# Altium PCB LHC.PcbDoc
Units mil, origin at the board's own origin, x right, y up, seen from the top; angles counter-clockwise.
Board outline 2559.05 x 2204.72 mil, 4 copper layers (Top Layer, Internal Plane 1, Internal Plane 2, Bottom Layer), stack 30.634 mil thick; 82 components, 84 nets, 364 pads, 68 vias.
Unrouted connection lines stored in the file: 1.
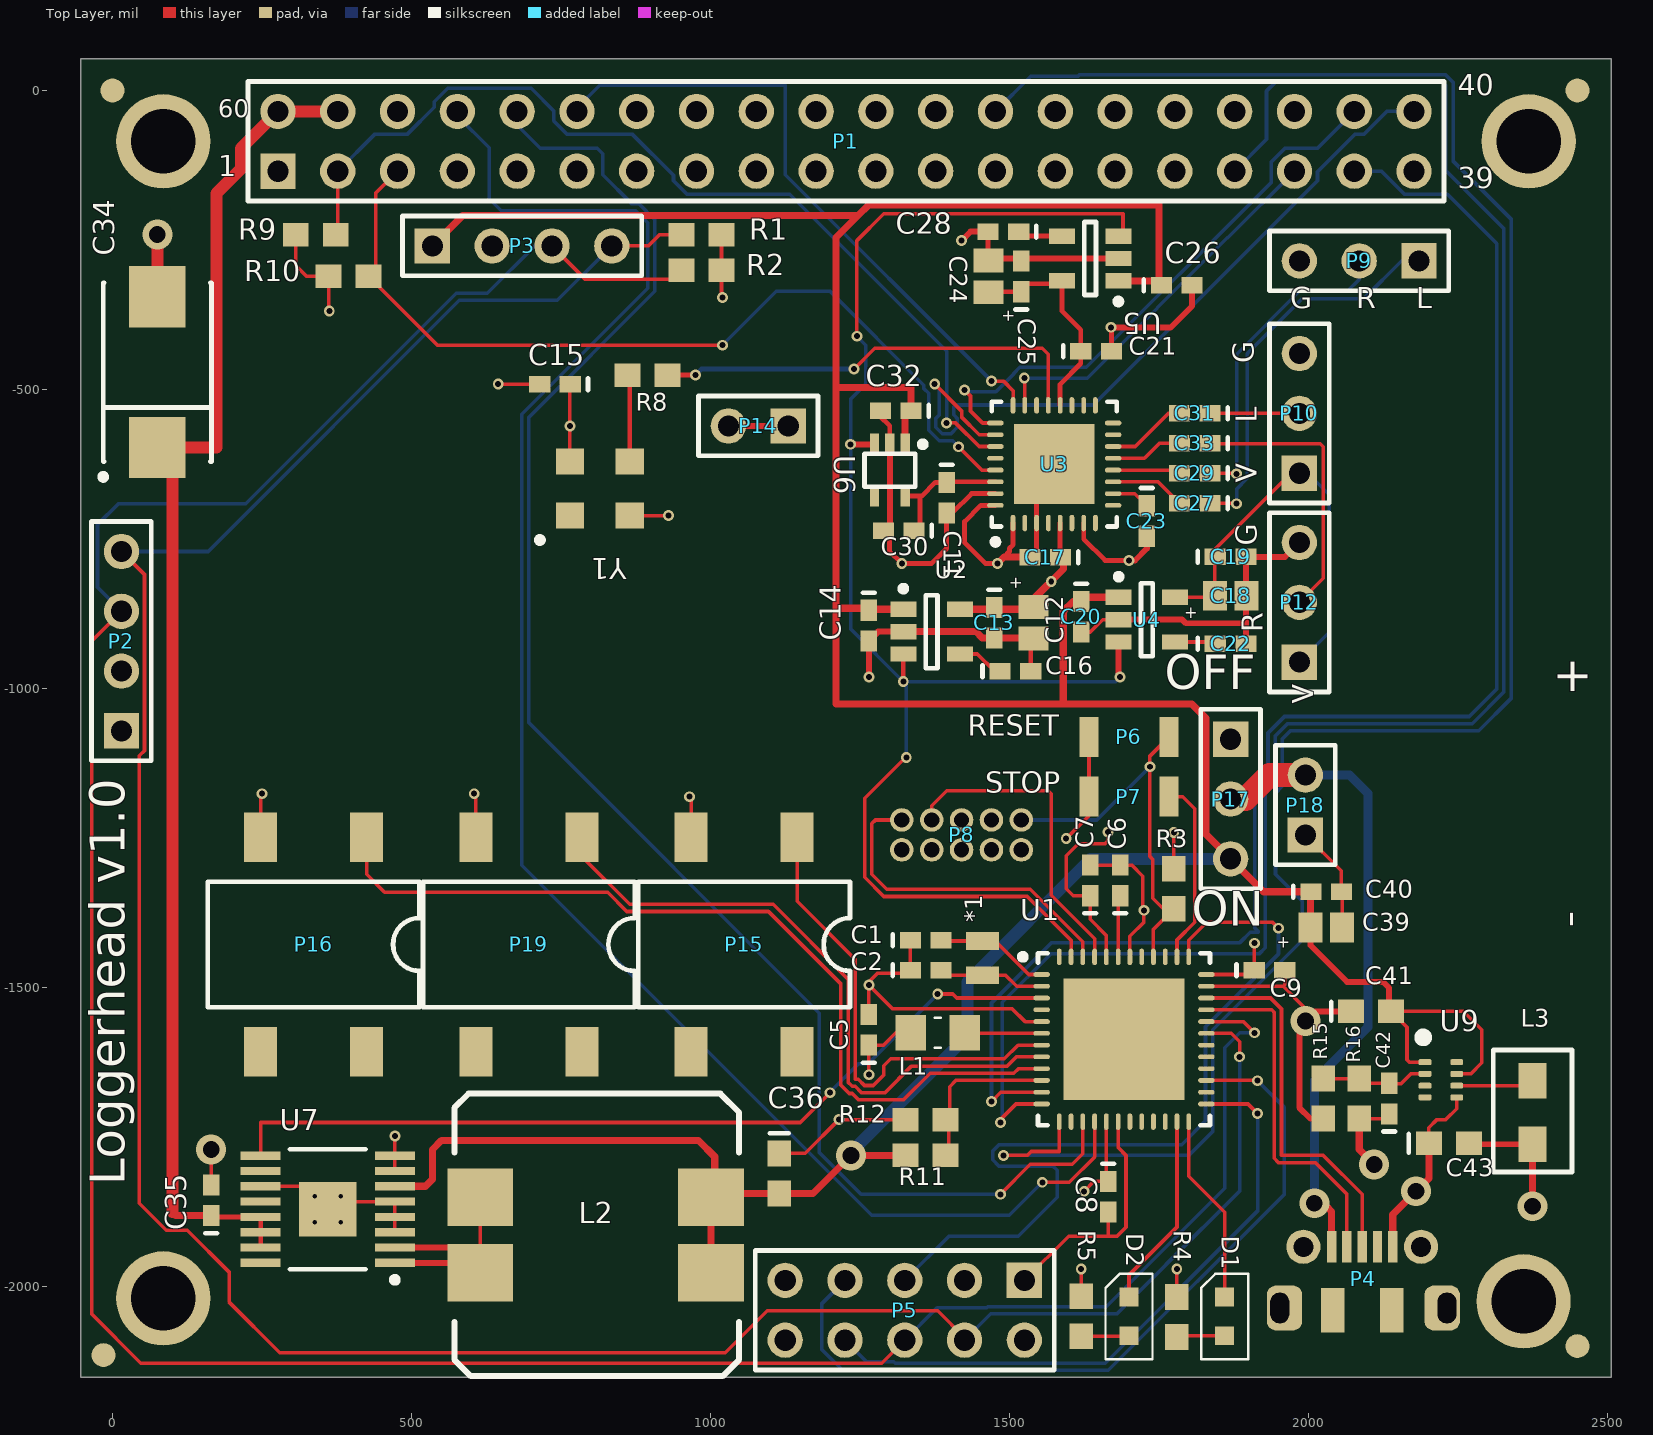
[diagram p0: Top Layer view]
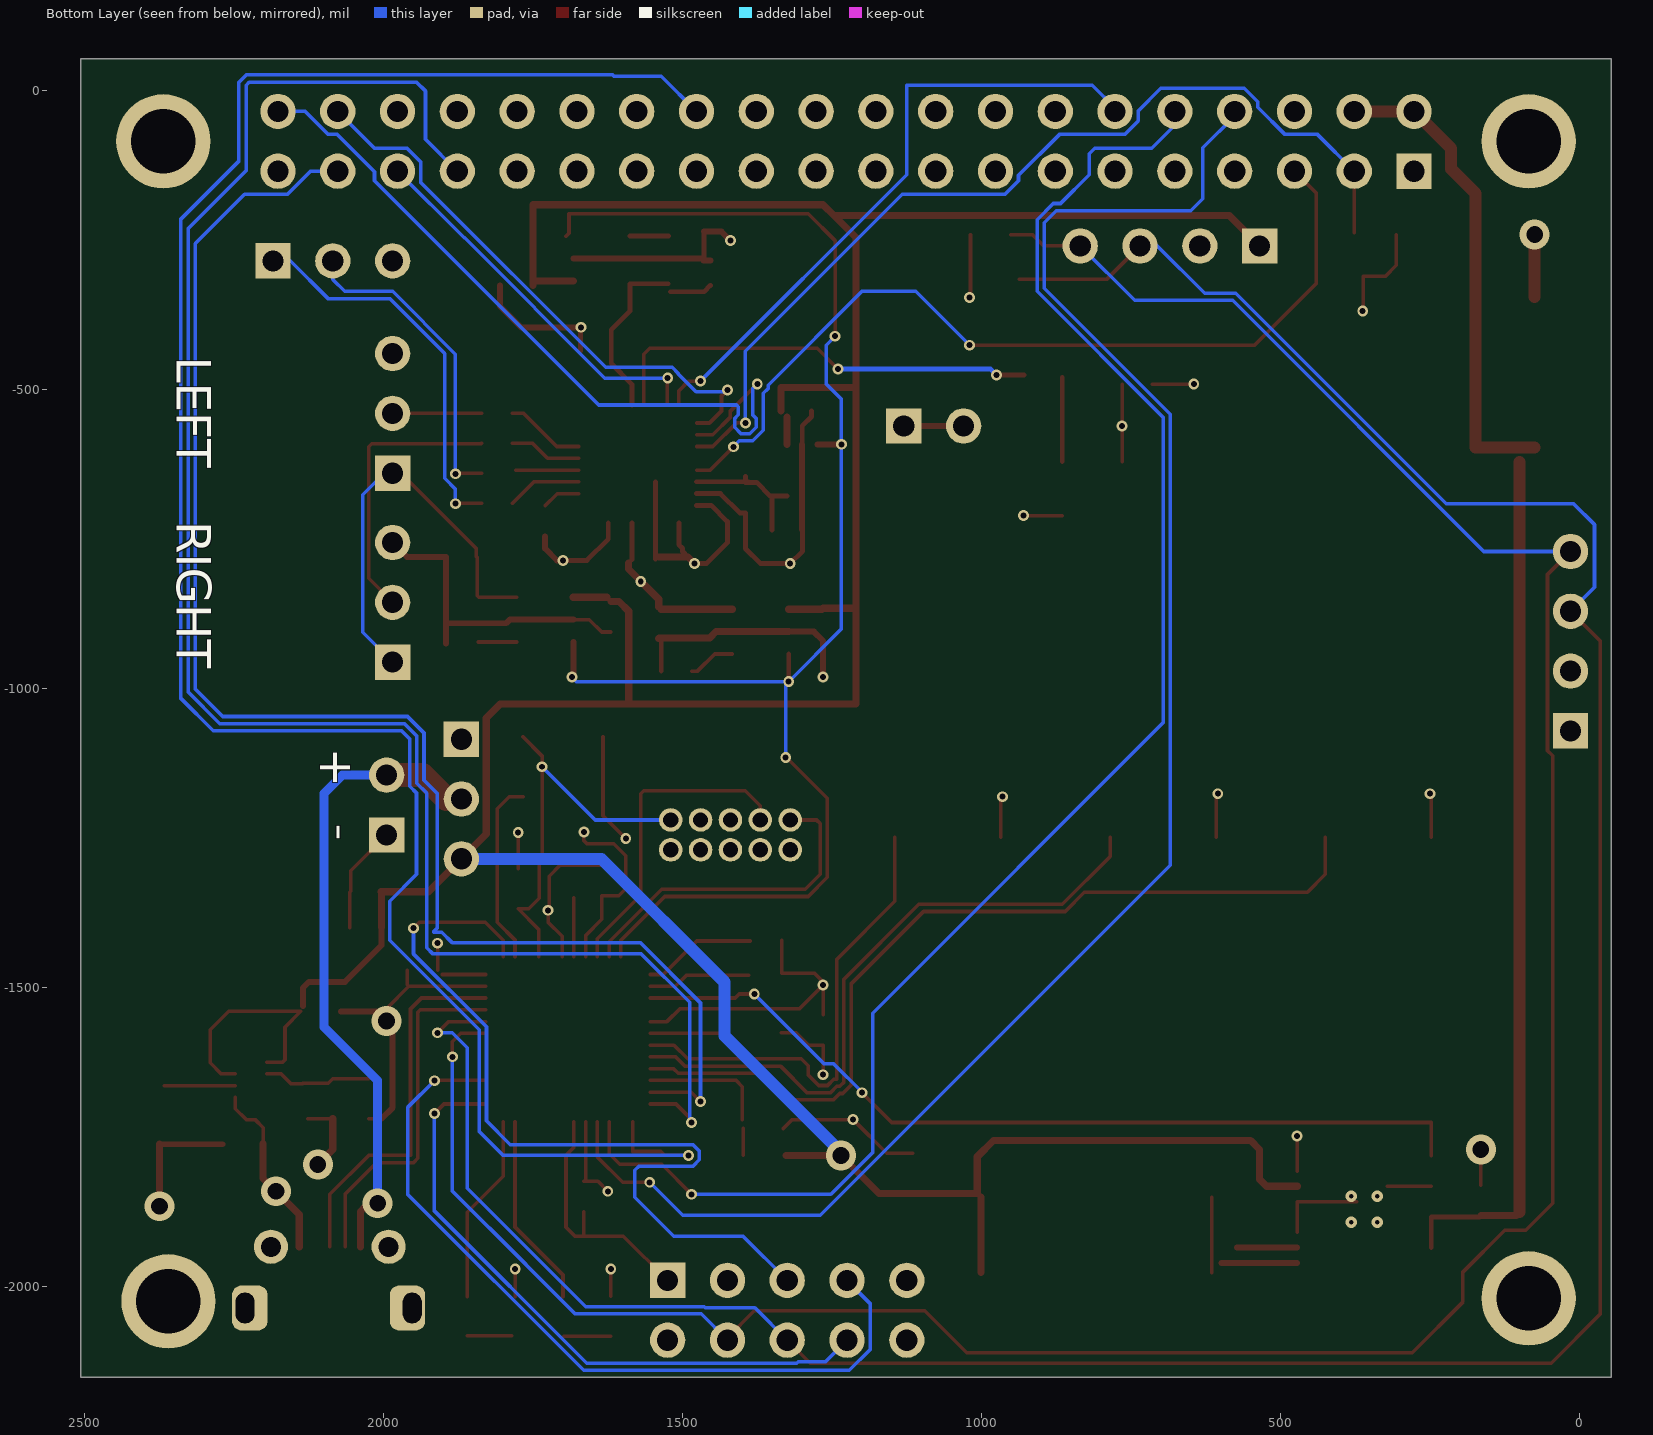
[diagram p1: Bottom Layer view, seen from below]
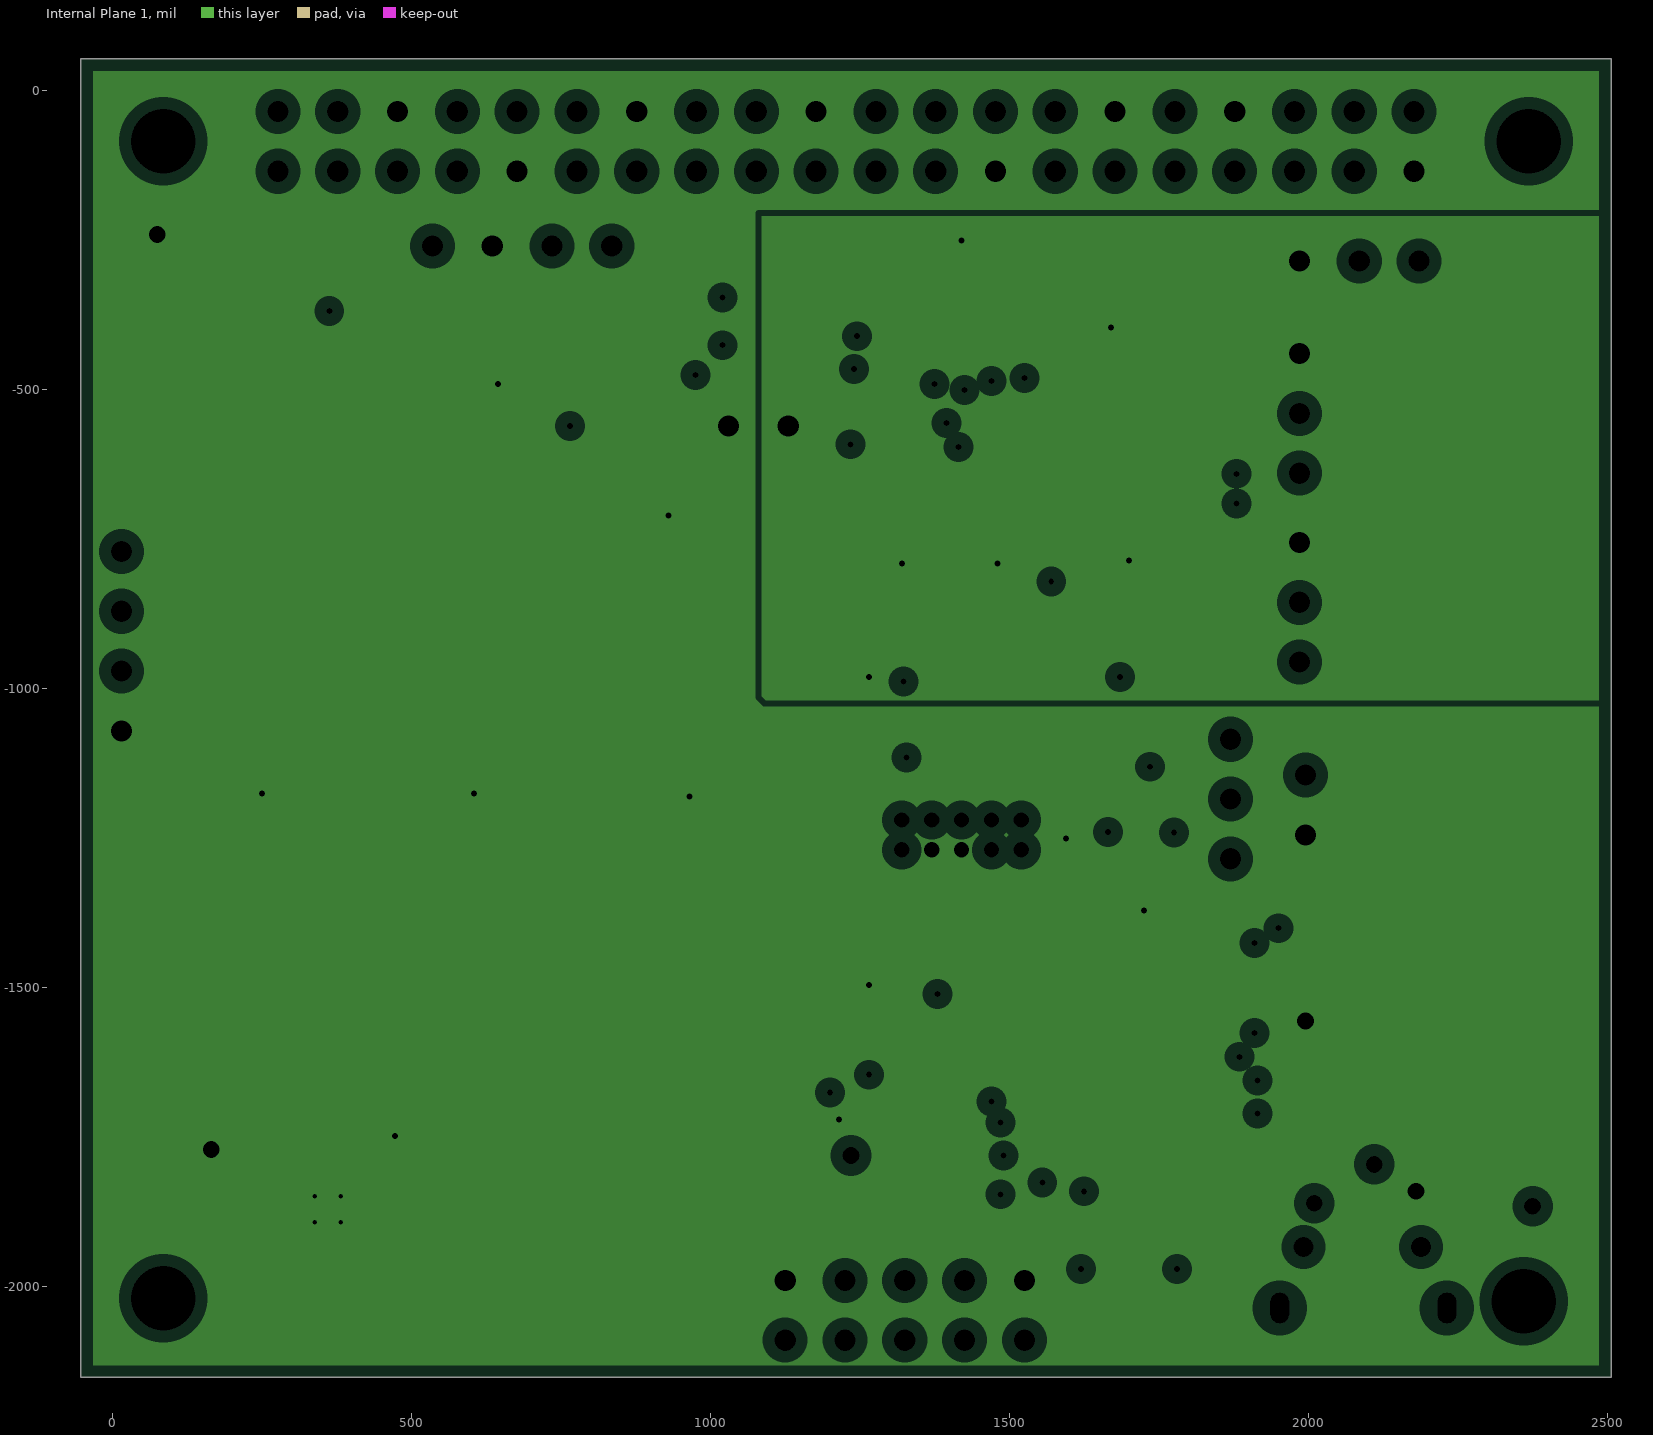
[diagram p2: Internal Plane 1, clearances drawn from the general rule]
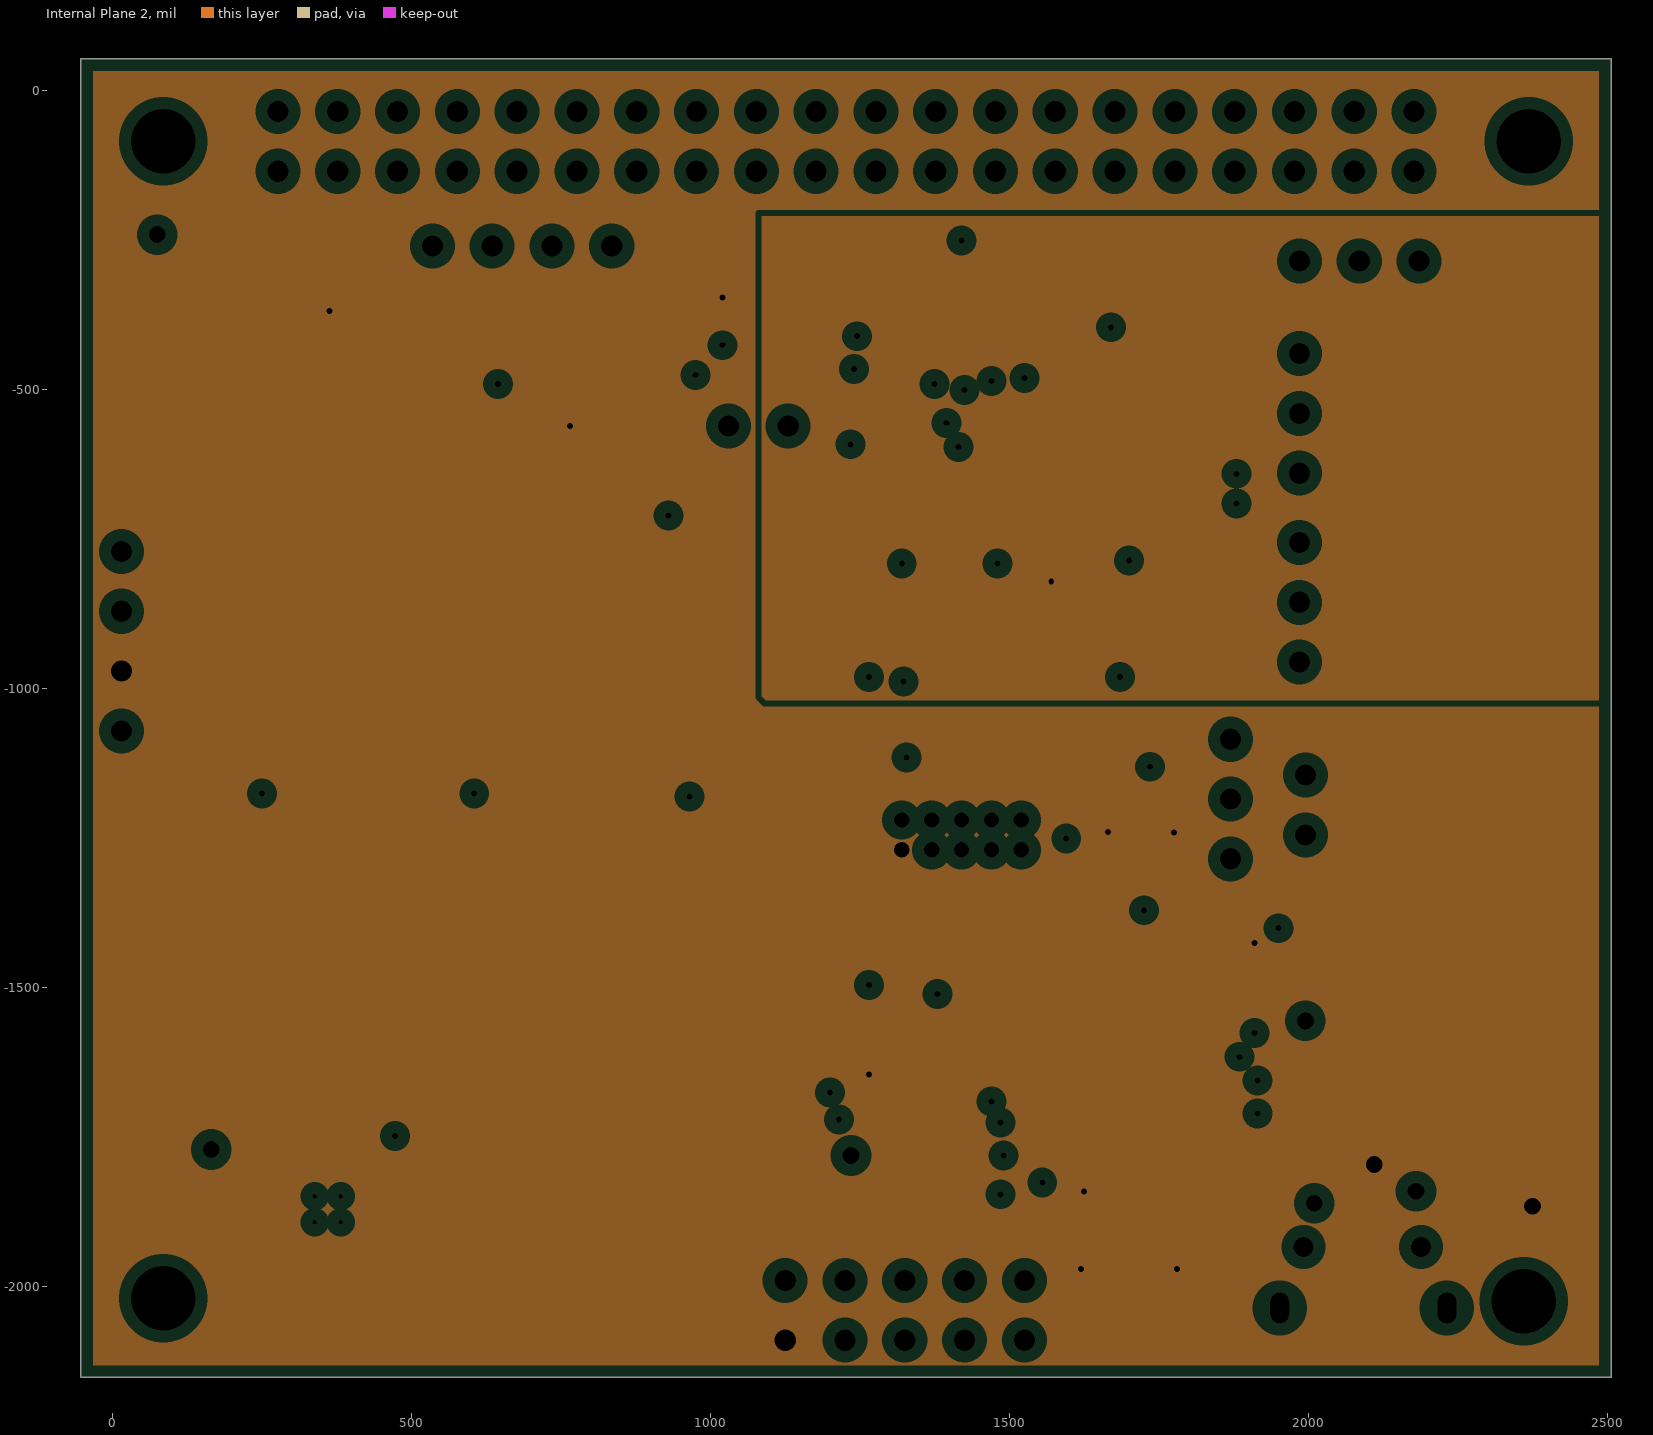
[diagram p3: Internal Plane 2, clearances drawn from the general rule]

## Layer stack, top to bottom
Top Solder: solder mask 0.4, Solder Resist, Dk 3.5
Top Layer: signal copper 1.4
Dielectric 1: core 10, FR-4, Dk 4.2
Internal Plane 1: plane copper 1.417, net (Multiple Nets)
Dielectric 3: prepreg 5, Dk 4.2
Internal Plane 2: plane copper 1.417, net (Multiple Nets)
Dielectric 2: core 10, Dk 4.2
Bottom Layer: signal copper 1.4
Bottom Solder: solder mask 0.4, Solder Resist, Dk 3.5

## Board outline
-52.8,-2151.93 -52.8,52.8 2506.26,52.8 2506.26,-2151.93

## Design rules (kind name [scope] priority, off if disabled: settings)
Clearance [All] p1: gap=6
PlaneClearance [All] p1: clearance=20
PlaneConnect [All] p1: planeconnectstyle=Relief reliefexpansion=20 reliefentries=4 reliefconductorwidth=10 reliefairgap=10
PolygonConnect [All] p1: connectstyle=Relief reliefconductorwidth=10 reliefentries=4 polygonreliefangle="90 Angle" airgapwidth=10
RoutingVias [All] p1: holewidth=10 width=50 viastyle="Through Hole" minholewidth=10 minwidth=18 maxholewidth=50 maxwidth=50
SolderMaskExpansion [All] p1: expansion=4
Width [All] p1: maxlimit=50 minlimit=6 preferedwidth=8
27 further rules are at their usual default settings.

## Classes and differential pairs
component class LHC: *1 C1 C2 C5 C6 C7 C8 C9 D1 D2 L1 P1 P2 P3 P4 P5 P6 P7 P8 P15 P16 P19 R1 R2 R3 R4 R5 U1
component class LHC_Power: 50 C34 C35 C36 C39 C40 C41 C42 C43 L2 L3 P17 P18 R11 R12 R15 R16 U7 U9
component class LHC_audio: C11 C12 C13 C14 C15 C16 C17 C18 C19 C20 C21 C22 C23 C24 C25 C26 C27 C28 C29 C30 C31 C32 C33 P9 P10 P12 P14 R8 R9 R10 U2 U3 U4 U5 U6 Y1

## Components (designator, comment, footprint, x,y, rotation, side; value= is the part's Value field where it differs from the comment)
*1 "XTAL_ABS06" XTAL-ABS06 1455,-1451 r90 top
C1 "22.5pF" 0402 1360,-1421 r0 top
C2 "22.5pF" 0402 1360,-1471 r0 top
C5 "0.1uF" 0402 1265,-1571 r90 top
C6 "0.1uF" 0402 1685,-1321 r90 top
C7 "0.1uF" 0402 1635,-1321 r90 top
C8 "0.1 uF" 0402 1665,-1850 r270 top
C9 "0.1 uF" 0402 1935,-1471 r0 top
C11 "0.1uF" 0402 1395,-681 r270 top
C12 "10uF" Tant0805 1540,-890 r90 top
C13 "0.1uF" 0402 1475,-890 r270 top
C14 "1uF" 0402 1264.84,-895 r270 top
C15 "0.1uF" 0402 740,-491 r180 top
C16 "0.01uF" 0402 1510,-971 r0 top
C17 "0.1uF" 0402 1560,-781 r180 top
C18 "10uF" Tant0805 1870,-845 r180 top
C19 "0.1uF" 0402 1870,-780 r0 top
C20 "1uF" 0402 1620,-880 r270 top
C21 "0.1uF" 0402 1645,-436 r0 top
C22 "0.01uF" 0402 1870,-925 r0 top
C23 "0.1uF" 0402 1730,-720 r270 top
C24 "10uF" Tant0805 1465,-311 r270 top
C25 "0.1uF" 0402 1520,-311 r90 top
C26 "1uF" 0402 1780,-326 r0 top
C27 "1.0uF" 0402 1810,-690 r180 top
C28 "0.01uF" 0402 1490,-236 r180 top
C29 "1.0uF" 0402 1810,-640 r180 top
C30 "1.0uF" 0402 1315,-736 r180 top
C31 "1.0uF" 0402 1810,-540 r180 top
C32 "1.0uF" 0402 1310,-536 r180 top
C33 "1.0uF" 0402 1810,-590 r180 top
C34 "220uF" X 75,-471 r90 top
C35 "2.2uF" 0402 165,-1856 r90 top
C36 "10uF" 0603 1115,-1811 r270 top
C39 "10uF" Tant0805 2030,-1400 r180 top
C40 "0.1uF" 0402 2030,-1340 r0 top
C41 "4.7uF" 0603 2105,-1540 r0 top
C42 "82pF" 0402 2135,-1686 r90 top
C43 "22uF" 0603 2235,-1761 r0 top
D1 "LED_0603" Diode0603 1860,-2050 r90 top
D2 "LED_0603" Diode0603 1700,-2050 r90 top
L1 "300Ohm" "0805 (M2125) Ferrite" 1380,-1576 r180 top
L2 "6.8uH" "Inductor - duplicate" 615,-1851 r90 top
L3 "470nH" Inductor_470NH 2375,-1656 r270 top
P1 "Header 20X2" HDR2X20 276.73,-135 r0 top
P2 "Header 4" HDR1X4 15,-1071 r90 top
P3 "Display" HDR1X4 535,-260 r0 top
P4 "Program" microUSB-B 2090,-1985 r0 top
P5 "Header 5X2" HDR2X5 1525,-1990 r180 top
P6 "Tactile" Tactile-B3U-1000 1700,-1081 r0 top
P7 "Tactile" Tactile-B3U-1000 1700,-1181 r0 top
P8 "Cortex Debug" Header_2x5_50mil 1520,-1270 r90 top
P9 "SPEAKER" HDR1X3 2185,-285 r180 top
P10 "HYDROPHONE" HDR1X3 1985,-640 r90 top
P12 "HYDROPHONE" HDR1X3 1985,-956 r90 top
P14 "GND Tie" HDR1X2 1130,-561 r180 top
P15 "pushbutton" SOP4 1145,-1249 r270 top
P16 "pushbutton" SOP4 425,-1249 r270 top
P17 "switch" HDR1X3 1870,-1085 r270 top
P18 "Molex" HDR1X2 1995,-1245 r90 top
P19 "pushbutton" SOP4 785,-1249 r270 top
R1 "4.7k" 3-0603 985,-241 r0 top
R2 "4.7k" 3-0603 985,-301 r0 top
R3 "10K" 3-0603 1775,-1335 r270 top
R4 "330X" 3-0603 1780,-2051 r270 top
R5 "330X" 3-0603 1620,-2050 r270 top
R8 "30X" 3-0603 895,-476 r180 top
R9 "4.7k" 3-0603 340,-241 r180 top
R10 "4.7k" 3-0603 395,-311 r180 top
R11 "100k" 3-0603 1360,-1781 r180 top
R12 "100k" 3-0603 1360,-1721 r0 top
R15 "150k" 3-0603 2025,-1686 r270 top
R16 "680k" 3-0603 2085,-1686 r90 top
U1 "ATSAMD21GA-MUT" QFN127P600-8N 1691.69,-1586.69 r0 top
U2 "LP3985IM5-3.3" MF05A_N 1369.84,-905 r0 top
U3 "SGTL5000" QFN32 1575,-625 r90 top
U4 "LP3985IM5-3.3" MF05A_N 1730,-885 r0 top
U5 "LP3985IM5-3.3" MF05A_N 1635,-281 r180 top
U6 "TLV70018DCKR" TI-DCK5_V 1300,-635 r270 top
U7 "TPS61032" TPS6103x 360,-1871 r180 top
U9 "TPS62822" TPS62822_SOP8 2195,-1625 r0 top
Y1 "12.288MHz" Oscillator_5x3.2 765,-711 r0 top

## Footprints (in the part's own frame and the unit in brackets; to place one, negate y for a bottom-side part, rotate by r counter-clockwise, add the part's x,y. Pads: shape width x height; smd on the part's side, far side on the other; paste and mask are expansions set on the pad)
3-0603 [mm] "Chip Resistor; Body 1.6 x 0.9 mm (LxW typ)"
  rect 1.1x1 smd: 1(-0.85,0) 2(0.85,0)
0402 [mm] "Chip Capacitor; Body 1.0 x 0.5 mm (LxW typ)"
  rect 0.9x0.7 smd: 1(-0.65,0) 2(0.65,0)
  silkscreen extent -1.4,-0.25 -1.4,0.25
0603 [mm] "Chip Capacitor; Body 1.6 x 0.8 mm (LxW typ)"
  rect 1.1x1 smd: 1(-0.85,0) 2(0.85,0)
  silkscreen extent -1.7,-0.4 -1.7,0.4
"0805 (M2125) Ferrite" [mm] "Chip Resistor; Body 2.0 x 1.3 mm (LxW typ)"
  rect 1.3x1.5 smd: 1(-1.15,0) 2(1.15,0)
  silkscreen extent -0.13,-0.64 0.13,0.64, body extent -1.15,-0.72 1.15,0.73, height 0.81
Diode0603 [mm]
  rect 0.8x0.8 smd: A(-0.825,0) K(0.825,0)
  silkscreen extent -1.83,-1 1.8,1
HDR1X2 [mm] "Connector; Header; 2 Position"
  rect 1.5x1.5 hole 0.9: 1(0,0)
  round 1.5 hole 0.9: 2(2.54,0)
  silkscreen extent -1.27,-1.27 3.81,1.27
HDR1X3 [mm] "Connector; Header; 3 Position"
  rect 1.5x1.5 hole 0.9: 1(0,0)
  round 1.5 hole 0.9: 2(2.54,0) 3(5.08,0)
  silkscreen extent -1.27,-1.27 6.35,1.27
HDR1X4 [mm] "Connector; Header; 4 Position"
  rect 1.5x1.5 hole 0.9: 1(0,0)
  round 1.5 hole 0.9: 2(2.54,0) 3(5.08,0) 4(7.62,0)
  silkscreen extent -1.27,-1.27 8.89,1.27
HDR2X5 [mm] "Connector; Header; 5x2 Position"
  rect 1.5x1.5 hole 0.9: 1(0,0)
  round 1.5 hole 0.9: 2(0,2.54) 3(2.54,0) 4(2.54,2.54) 5(5.08,0) 6(5.08,2.54) 7(7.62,0) 8(7.62,2.54) 9(10.16,0) 10(10.16,2.54)
  silkscreen extent -1.27,-1.27 11.43,3.81
HDR2X20 [mm] "Connector; Header; 20x2 Position"
  rect 1.5x1.5 hole 0.9: 1(0,0)
  round 1.5 hole 0.9: 2(0,2.54) 3(2.54,0) 4(2.54,2.54) 5(5.08,0) 6(5.08,2.54) 7(7.62,0) 8(7.62,2.54) 9(10.16,0) 10(10.16,2.54) 11(12.7,0) 12(12.7,2.54) 13(15.24,0) 14(15.24,2.54) 15(17.78,0) 16(17.78,2.54) 17(20.32,0) 18(20.32,2.54) 19(22.86,0) 20(22.86,2.54) 21(25.4,0) 22(25.4,2.54) 23(27.94,0) 24(27.94,2.54) 25(30.48,0) 26(30.48,2.54) 27(33.02,0) 28(33.02,2.54) 29(35.56,0) 30(35.56,2.54) 31(38.1,0) 32(38.1,2.54) 33(40.64,0) 34(40.64,2.54) 35(43.18,0) 36(43.18,2.54) 37(45.72,0) 38(45.72,2.54) 39(48.26,0) 40(48.26,2.54)
  silkscreen extent -1.27,-1.27 49.53,3.81
Header_2x5_50mil [mm]
  round 1 hole 0.65: 1(0,0) 2(1.27,0) 3(0,1.27) 4(1.27,1.27) 5(0,2.54) 6(1.27,2.54) 7(0,3.81) 8(1.27,3.81) 9(0,5.08) 10(1.27,5.08)
"Inductor - duplicate" [mm] "Sumida Inductor"
  rect 2.45x2.8 smd: 1(-3.2,0) 1(0,0) 2(-3.2,-9.8) 2(0,-9.8)
  silkscreen extent -7.6,-11 4.4,1.1
Inductor_470NH [mm] "Vishay IHLP1212AEERR47M11"
  rect 1.5x1.2 smd: 1(0,0) 2(2.7,0)
  silkscreen extent -1.3,-1.67 3.87,1.68
MF05A_N [mm] "SOT23, 5-Leads, Body 2.9x1.6mm, Pitch 0.95mm, Lead Span 2.8mm, IPC Medium Density"
  rect 1.1x0.65 smd: 1(-1.2,0.95) 2(-1.2,0) 3(-1.2,-0.95) 4(1.2,-0.95) 5(1.2,0.95)
  silkscreen extent -1.32,-1.55 0.25,1.95, body extent -0.9,-1.55 0.9,1.55, height 1.19
microUSB-B [mm]
  rect 0.4x1.35 smd: 1(-1.3,1.3) 2(-0.65,1.3) 3(0,1.3) 4(0.65,1.3) 5(1.3,1.3)
  rrect50% 1.5x1.9 hole 0.8 slot 1.3 at 90 deg copper offset 0.2,0: ""(-3.5,-1.3)
  round 1.45 hole 0.85: ""(-2.5,1.3) ""(2.5,1.3)
  rect 1x1.9 smd: ""(-1.25,-1.4) ""(1.25,-1.4)
  rrect50% 1.5x1.9 hole 0.8 slot 1.3 at 90 deg copper offset -0.2,0: ""(3.6,-1.3)
  body extent -4.1,-4.07 4.1,1.36, height 2.68
Oscillator_5x3.2 [mm] "Abracon ASFLMB"
  rect 1.2x1.1 smd: 1(0,0) 2(2.54,0) 3(2.54,2.3) 4(0,2.3)
  silkscreen extent -1.4,-1.16 -1.15,-0.91
QFN32 [mm]
  oval 0.7x0.2 smd: 1(-2.5,1.75) 2(-2.5,1.25) 3(-2.5,0.75) 4(-2.5,0.25) 5(-2.5,-0.25) 6(-2.5,-0.75) 7(-2.5,-1.25) 8(-2.5,-1.75) 17(2.5,-1.75) 18(2.5,-1.25) 19(2.5,-0.75) 20(2.5,-0.25) 21(2.5,0.25) 22(2.5,0.75) 23(2.5,1.25) 24(2.5,1.75)
  oval 0.2x0.7 smd: 9(-1.75,-2.5) 10(-1.25,-2.5) 11(-0.75,-2.5) 12(-0.25,-2.5) 13(0.25,-2.5) 14(0.75,-2.5) 15(1.25,-2.5) 16(1.75,-2.5) 25(1.75,2.5) 26(1.25,2.5) 27(0.75,2.5) 28(0.25,2.5) 29(-0.25,2.5) 30(-0.75,2.5) 31(-1.25,2.5) 32(-1.75,2.5)
  rect 3.4x3.4 smd paste-1.2: 33(0,0)
  silkscreen extent -3.42,-2.65 2.65,2.65, body extent -2.5,-2.5 2.5,2.5, height 1
QFN127P600-8N [mm]
  oval 0.7x0.2 smd: 1(-3.5,2.75) 2(-3.5,2.25) 3(-3.5,1.75) 4(-3.5,1.25) 5(-3.5,0.75) 6(-3.5,0.25) 7(-3.5,-0.25) 8(-3.5,-0.75) 9(-3.5,-1.25) 10(-3.5,-1.75) 11(-3.5,-2.25) 12(-3.5,-2.75) 25(3.5,-2.75) 26(3.5,-2.25) 27(3.5,-1.75) 28(3.5,-1.25) 29(3.5,-0.75) 30(3.5,-0.25) 31(3.5,0.25) 32(3.5,0.75) 33(3.5,1.25) 34(3.5,1.75) 35(3.5,2.25) 36(3.5,2.75)
  oval 0.2x0.7 smd: 13(-2.75,-3.5) 14(-2.25,-3.5) 15(-1.75,-3.5) 16(-1.25,-3.5) 17(-0.75,-3.5) 18(-0.25,-3.5) 19(0.25,-3.5) 20(0.75,-3.5) 21(1.25,-3.5) 22(1.75,-3.5) 23(2.25,-3.5) 24(2.75,-3.5) 37(2.75,3.5) 38(2.25,3.5) 39(1.75,3.5) 40(1.25,3.5) 41(0.75,3.5) 42(0.25,3.5) 43(-0.25,3.5) 44(-0.75,3.5) 45(-1.25,3.5) 46(-1.75,3.5) 47(-2.25,3.5) 48(-2.75,3.5)
  rect 5.15x5.15 smd paste-1.194: 49(0,0)
  silkscreen extent -4.42,-3.65 3.65,3.65, body extent -3.5,-3.5 3.5,3.5, height 0.85
SOP4 [mm]
  rect 2.1x1.4 smd: 1(0,0) 2(0,-4.5) 3(9.1,-4.5) 4(9.1,0)
  silkscreen extent 1.89,-6.75 7.21,2.25
Tactile-B3U-1000 [mm]
  rect 0.8x1.7 smd: 1(-1.7,0) 2(1.7,0)
Tant0805 [mil]
  rect 40x50 smd: 1(-26.5,0) 2(26.5,0)
TI-DCK5_V [mm] "SOT23, 5-Leads, Body 2x1.25mm, Pitch 0.65mm"
  rect 0.9x0.4 smd: 1(-1.1,0.65) 2(-1.1,0) 3(-1.1,-0.65) 4(1.1,-0.65) 5(1.1,0.65)
  silkscreen extent -1.22,-1.07 0.7,1.53, body extent -0.63,-1 0.63,1, height 1.1
TPS6103x [mm] "TSOP, 16-Leads, Body 5.00x4.40mm, Pitch 0.65mm, Thermal Pad 2.31.2x2.46.2mm, IPC Medium Density"
  rect 1.7x0.35 smd: 1(-2.85,2.275) 2(-2.85,1.625) 3(-2.85,0.975) 4(-2.85,0.325) 5(-2.85,-0.325) 6(-2.85,-0.975) 7(-2.85,-1.625) 8(-2.85,-2.275) 9(2.85,-2.275) 10(2.85,-1.625) 11(2.85,-0.975) 12(2.85,-0.325) 13(2.85,0.325) 14(2.85,0.975) 15(2.85,1.625) 16(2.85,2.275)
  rect 2.46x2.31 smd: 17(0,0)
  silkscreen extent -2.98,-2.55 1.6,3.12, body extent -2.25,-2.55 2.25,2.55, height 1.2
TPS62822_SOP8 [mm]
  rrect50% 0.55x0.25 smd: 1(0,0) 2(0,-0.5) 3(0,-1) 4(0,-1.5) 5(1.35,-1.5) 6(1.35,-1) 7(1.35,-0.5) 8(1.35,0)
  silkscreen extent -0.2,0.93 0.05,1.17
X [mm] "Capacitor, SM Tantalum; Body 7.3 x 4.3 mm (LxW typ)"
  rect 2.6x2.4 smd: 1(-3.2,0) 2(3.2,0)
  silkscreen extent -4.57,-2.3 3.8,2.42
XTAL-ABS06 [mm]
  rect 0.75x1.4 smd: 1(-0.725,0) 2(0.725,0)

## Part data
C1 C2 C5 C6 C7 C8 C9 C11 C13 C14 C15 C16 C17 C19 C20 C21 C22 C23 C25 C26 C27 C28 C29 C30 C31 C32 C33 C35 C40 C42: library part C0402, "Ceramic Chip Capacitor - Standard"
C12 C18 C24 C39: library part Tant0805
C34: library part T495X, "Solid Tantalum Chip Capacitor, Standard T495 Series - Low ESR, Surge Robust"
C36: library part C0603, "Ceramic Chip Capacitor - 0603"
C41 C43: library part C0603, "Ceramic Chip Capacitor - Standard"
L1: library part "Ferrite 0805(M2125) 3A", "Ferrite 25mOhm@DC,  60 Ohm@100MHz"
L2: library part "Inductor 6.8uH", "Sumida Inductor"
L3: library part Inductor_470NH
P1: "Header, 20-Pin, Dual row"
P2: "Header, 4-Pin"
P3: library part "Header 4", "Header, 4-Pin"
P4: library part microUSB-B
P5: "Header, 5-Pin, Dual row"
P6 P7: library part Tactile_B3U-1000
P8: library part CortexDebug
P9 P10 P12 P17: library part "Header 3", "Header, 3-Pin"
P14 P18: library part "Header 2", "Header, 2-Pin"
R1 R2 R3 R4 R5 R8 R9 R10 R11 R12 R15 R16: library part ERJ3RK, "Precision Thick Film Chip Resistor, 10 Ohm to 1M Ohm Range, 1% and 0.5% Tolerance, 0603 Size, 0.063 W"
U1: library part ATSAMD21G18
U2 U4 U5: "Micropower, 150mA Low-Noise Ultra Low-Dropout CMOS Voltage Regulator"
U6: "Single Output LDO, 200 mA, Fixed 1.8 V Output, 2 to 5.5 V Input, with Low IQ, 5-pin SC70 (DCK), -40 to 125 degC, Green (RoHS & no Sb/Br)"
U7: library part TPS6103x, "Boost converter"
U9: "Step-down converter"
Y1: library part Oscillator_5x3.2

## Free pads (board coordinates)
  round 40 smd paste-20 mask+5: 0(-15,-2115) 0(0,0) 0(2450,-2100) 0(2450,0)
  round 157.48 hole 108.27: 0(85,-2020) 0(85,-85) 0(2360,-2025) 0(2368.46,-85)

## Via types
v1: diameter 18, hole 10, Top Layer to Bottom Layer, 56 vias
v2: diameter 50, hole 28, Top Layer to Bottom Layer, 8 vias
v3: diameter 19.68, hole 7.87, Top Layer to Bottom Layer, 4 vias

## Nets (pads, with @x,y where several pads share a name; then routed paths per layer and width w, separated by ;. In a path a pad name is that pad's centre, name@x,y a point inside that pad or via, vN(x,y) a via of type N, cw(c..) or ccw(c..) an arc to the next point about the centre after c; other vN are vias at no path point)
3V3: P1.1 P1.17
5V: C34.1 C35.1 P1.2 P1.4 U7.13 U7.14 U7.15 | length 2257.6
  Top Layer w8: C35.1@167.2,-1883.8 U7.13 U7.14 U7.15
  Top Layer w12: 100,-1876 105.59,-1881.59 C35.1
  Top Layer w20: C34.1 174.02,-596.98 174.02,-171.98 215,-131 215,-96.73 P1.2 P1.4 ; 100,-1876 C34.1@100,-621
5V_ENABLE: U1.3 U7.9 | length 1453.7
  Top Layer w6: U7.9 247.8,-1726 1150,-1726 v1(1200,-1676) ; v1(1380,-1511) 1405,-1511 1411.8,-1517.8 U1.3
  Bottom Layer w6: v1@1199.5,-1675.5 1247,-1628 1263,-1628 v1(1380,-1511)
A4: R11.1 R12.2 U1.10 | length 258.2
  Top Layer w6: R11.1@1398.46,-1781 R12.2@1398.46,-1736 ; R12.2@1400,-1721 1400,-1666 1410.41,-1655.59 U1.10
AGND: C11.2 C12.1 C13.2 C14.2 C16.2 C17.2 C18.1 C19.2 C20.2 C21.2 C22.2 C23.2 C24.1 C25.2 C26.2 C28.2 C30.2 C32.2 P9.3 P10.3 P12.3 P14.1 U2.2 U3.1 U3.3 U3.7 U3.31 U3.32 U3.33 U4.2 U5.2 U6.2 | length 2591
  Top Layer w6: C20.2 1635.41,-905.59 1656,-885 U4.2
  Top Layer w8: C32.2 1284.41,-545.41 1300,-561 U6.2 ; C30.2@1299.41,-735 1299.41,-770.41 v1(1320,-791) 1370,-791 1395,-766 C11.2 1404.41,-706.59 1436.79,-674.21 U3.31 ; C24.1@1464.41,-283.91 1464.41,-281 C28.2 ; U3.32 1452.1,-693.9 1425,-721 1425,-756 1460,-791 v1(1480,-791) ; 1491,-780 1500,-771 1500,-766 1506.1,-759.9 U3.1 ; C16.2 C12.1@1535.59,-919.09 ; C17.2@1545.47,-783.94 U3.3 U3.33@1545.47,-654.53 ; U3.7 1624.21,-750.21 1660,-786 1710,-786 ; C21.2 v1@1670.59,-396.59
  Top Layer w10: v1(1265,-981) 1265,-976 1264.84,-975.84 C14.2 1280.43,-905 U2.2 ; C30.2@1300,-734.41 U6.2 ; v1(1420,-251) 1435,-236 C28.2 ; C24.1@1453.5,-284.5 C24.1 ; C24.1@1464.41,-281 U5.2 ; v1(1670,-396) 1670.59,-396.59 1769.41,-396.59 1805.59,-360.41 C26.2 ; U4.2 1789,-885 1795,-891 1895.59,-891 ; 1710,-786 1730,-766 C23.2 ; C22.2 1895.59,-891 ; P12.3 1961,-780 C19.2 1895.59,-891
  Top Layer w12: U2.2 1444,-905 1454.59,-915.59 C13.2 1539.09,-915.59 C12.1 ; v1(1480,-791) 1491,-780 C17.2@1539.41,-780
  other v1: 1700,-786
BCLK: P1.12 U3.24 | length 1075
  Top Layer w6: v1(1470,-486) 1490,-486 1506.1,-502.1 U3.24
  Bottom Layer w6: P1.12 776.73,-29.27 815,9 1125,9 1125,-141 v1(1470,-486)
BCM0: P1.27
BCM1: P1.28
BCM4: P1.7
BCM5: P1.29
BCM6: P1.31
BCM8: P1.24
BCM9: P1.21
BCM10: P1.19
BCM11: P1.23
BCM16: P1.36
BCM17: P1.11
BCM22: P1.15
BCM23: P1.16
BCM24: P1.18
BCM25: P1.22
BCM27: P1.13
D+: P4.3 U1.34 | length 627.8
  Top Layer w6: U1.34 1936.8,-1517.8 1955,-1536 1955,-1781 2025,-1781 2090,-1846 P4.3
D-: P4.2 U1.33 | length 593.8
  Top Layer w6: U1.33 1938.52,-1537.48 1943,-1541.96 1943,-1785.97 1950.03,-1793 2012,-1793 2064.41,-1845.41 P4.2
DGND: C1.1 C2.1 C5.2 C6.2 C7.2 C8.2 C9.2 C15.2 C34.2 C35.2 C36.1 C39.1 C40.2 C41.1 C43.1 P1.6 P1.9 P1.14 P1.20 P1.25 P1.30 P1.34 P1.39 P2.1 P3.2 P4.5 P5.1 P5.9 P6.1 P7.1 P8.5 P8.7 P14.2 P15.2 P16.2 P18.1 P19.2 R12.1 R15.2 U1.5 U1.18 U1.35 U1.42 U7.3 U7.4 U7.5 U7.7 U7.8 U7.11 U7.17 U9.5 Y1.2 | length 3374.3
  Top Layer w6: C35.2 v2(165,-1771) ; U7.11 U7.17@321.61,-1832.61 ; P16.2 v1@247.83,-1178.17 ; U7.17@372.8,-1858.2 U7.5 U7.4 U7.3 ; U7.7 U7.8 v1@472.2,-1748.8 ; P19.2 v1@607.83,-1178.83 ; v1(645,-491) C15.2 ; Y1.2 v1(930,-711) ; P15.2 v1@967.83,-1183.83 ; C36.1 1158.46,-1777.54 v1(1215,-1721) 1316.54,-1721 R12.1@1331.54,-1736 ; C5.2 1265,-1491 1280,-1476 1334.41,-1476 C1.1 ; v1(1265,-1496) 1305,-1536 1505,-1536 1526.17,-1557.17 U1.5 ; P5.1 1599,-1916 1665,-1916 ; v1(1595,-1251) 1633.07,-1212.93 P7.1 P6.1 ; C7.2@1630,-1290.41 C7.2 C6.2 1704.41,-1295.41 1723,-1314 1723,-1369 v1(1725,-1371) 1725,-1391 1701.54,-1414.46 U1.42 ; C8.2 1665,-1916 ; U1.18 1681.85,-1767.85 1695,-1781 1695,-1901 1680,-1916 1665,-1916 ; U1.35 1957.89,-1498.11 ; C9.2 1960.59,-1495.41 1957.89,-1498.11 ; P18.1 2055,-1305 2055,-1339.41 C40.2 2056.5,-1340.91 C39.1 ; 2003.46,-1719.46 R15.2 ; v2@2011,-1540 v2(1995,-1556) 1995,-1535.22 1957.89,-1498.11 ; C43.1 2201.54,-1734.46 2215,-1721 2230,-1721 2248.15,-1702.85 U9.5
  Top Layer w10: v2@1985,-1566 1985,-1701 2003.46,-1719.46 ; v2@2011,-1540 C41.1
  Top Layer w12: P4.5 2141.18,-1879.82 2201.54,-1819.46 C43.1
  Top Layer w20: C34.2 v2(75,-241)
  other v1: 472.6,-1748.6 965,-1181 250,-1176 605,-1176
  other v2: 2180,-1841
  other v3: 338.35,-1892.65 381.65,-1892.65 338.35,-1849.35 381.65,-1849.35
DN-TX: P19.1 U1.8 | length 1090.1
  Top Layer w6: P19.1 785,-1281 865,-1361 1105,-1361 1230.22,-1486.22 1230.22,-1658.43 1237.25,-1665.46 1242.03,-1665.46 1252.57,-1676 1291.97,-1676 1336.38,-1631.59 1496.38,-1631.59 1511.75,-1616.22 U1.8
ENT-RST: P15.1 U1.7 | length 797.8
  Top Layer w6: P15.1 1145,-1356 1242.22,-1453.22 1242.22,-1653.46 1247,-1653.46 1257.54,-1664 1272.46,-1664 1290,-1646.46 1290,-1631 1301.41,-1619.59 1491.41,-1619.59 1514.46,-1596.54 U1.7
GPSEN: P5.5 U1.37 | length 1431.7
  Top Layer w6: U1.37 1799.96,-1421.04 1830,-1391 1940,-1391 v1(1950,-1401)
  Bottom Layer w6: P5.5 1399,-1916 1515,-1916 1580,-1851 1580,-1806 1573,-1799 1482.54,-1799 1472,-1788.46 1472,-1773.54 1482.54,-1763 1788,-1763 1828,-1723 1828,-1566.03 1950,-1444.03 v1(1950,-1401)
I2SDIN: P1.40 U3.26 | length 1285.8
  Top Layer w6: v1(1375,-491) 1420,-536 1420,-546 1449.79,-575.79 U3.26
  Bottom Layer w6: v1(1375,-491) 1383,-499 1383,-542.54 1377,-548.54 1377,-563.46 1387.54,-574 1402.46,-574 1413,-563.46 1413,-548.54 1407,-542.54 1407,-529 1410,-526 1640.22,-526 2015.26,-150.96 2015.26,-135.74 2077.47,-73.53 2092.69,-73.53 2131.22,-35 P1.40
I2SDOUT: P1.38 U3.25 | length 956.9
  Top Layer w6: v1(1425,-501) 1435,-511 1435,-536 1455.1,-556.1 U3.25
  Bottom Layer w6: v1(1425,-501) 1428,-504 1477.46,-504 1507,-474.46 1507,-473.54 1517.54,-463 1628.46,-463 1938.2,-153.25 1938.2,-119.04 1960.77,-96.47 2015.26,-96.47 P1.38
IN_L: C31.2 U3.14 | length 134
  Top Layer w6: U3.14 1710.53,-595.47 1766,-540 C31.2
IN_R: C33.2 U3.13 | length 121.4
  Top Layer w6: U3.13 1725.84,-615.16 1751,-590 C33.2
LED1: D1.K U1.24 | length 317.9
  Top Layer w6: U1.24 1799.96,-1815.96 1860,-1876 D1.K
LED2: D2.K U1.23 | length 326.3
  Top Layer w6: D2.K 1700,-1981 1780.28,-1900.72 U1.23
LRCLK: P1.35 U3.23 | length 640.6
  Top Layer w6: U3.23 v1@1525.79,-481
  Bottom Layer w6: v1(1525,-481) 1630,-481 1864.53,-246.47 1865.26,-246.47 P1.35
MCLK: R8.2 Y1.3 | length 141
  Top Layer w8: Y1.3 R8.2@865,-479.46
MISO: U1.21
MOSI: U1.19
Net*1_1: *1.1 C2.2 U1.2 | length 172.5
  Top Layer w6: C2.2@1389.13,-1479.54 *1.1 1493.54,-1479.54 1512.11,-1498.11 U1.2
Net*1_2: *1.2 C1.2 U1.1 | length 190
  Top Layer w6: C1.2@1387.05,-1422.46 *1.2 1476.46,-1422.46 1532.43,-1478.43 U1.1
NetC6_1: C6.1 U1.43 | length 99.2
  Top Layer w6: U1.43 C6.1@1681.85,-1349.74
NetC16_1: C16.1 U2.4 | length 79.2
  Top Layer w6: U2.4 1446.4,-942.4 1475,-971 C16.1
NetC22_1: C22.1 U4.4 | length 64.6
  Top Layer w6: U4.4 C22.1@1841.81,-922.4
NetC23_1: C23.1 U3.10 | length 64.9
  Top Layer w6: U3.10 1709.8,-674.21 C23.1
NetC27_2: C27.2 U3.11 | length 125.7
  Top Layer w6: U3.11 1748.53,-654.53 1784,-690 C27.2
NetC28_1: C28.1 U5.4 | length 64.6
  Top Layer w8: C28.1@1523.19,-243.6 U5.4
NetC29_2: C29.2 U3.12 | length 105.8
  Top Layer w6: U3.12 C29.2@1779.25,-634.84
NetC31_1: C31.1 P10.2 | length 149.4
  Top Layer w6: C31.1 P10.2
NetC33_1: C33.1 P12.2 | length 491
  Top Layer w6: C33.1 C33.1@1836.59,-590 ; C33.1@1836.59,-591 2020,-591 2025,-596 2025,-816 P12.2 P12.2@1985,-833.06
NetC42_2: C42.2 R15.1 R16.2 U9.2 | length 180.3
  Top Layer w6: R15.1 R16.2 2092.87,-1660.41 C42.2 2135.59,-1661 2155,-1661 2171.31,-1644.68 U9.2
NetD1_A: D1.A R4.2 | length 74
  Top Layer w6: R4.2@1785.98,-2082.48 D1.A
NetD2_A: D2.A R5.2 | length 79
  Top Layer w6: R5.2 D2.A@1699.02,-2083.46
NetL1_1: L1.1 U1.6 | length 127.8
  Top Layer w6: L1.1@1426.13,-1576.85 U1.6
NetL2_1: L2.1 U7.1 U7.2 | length 353.1
  Top Layer w6: L2.1@615,-1976.98 L2.1@615,-1851
  Top Layer w10: U7.1 L2.1@598.58,-1960.57 ; U7.2 L2.1@572.99,-1934.98
NetL3_1: L3.1 U9.6 | length 118.5
  Top Layer w6: U9.6 L3.1@2366.63,-1664.37
NetR8_1: R8.1 U3.21 | length 745
  Top Layer w6: v1(1240,-466) 1275,-431 1555,-431 1565.16,-441.16 U3.21
  Top Layer w8: R8.1 v1(975,-476)
  Bottom Layer w8: v1(975,-476) 985,-466 v1(1240,-466)
OUT_L: C27.1 P9.1 | length 655.1
  Top Layer w6: C27.1 v1@1881,-690
  Bottom Layer w6: v1(1880,-691) 1880,-666.46 1898,-648.46 1898,-439.97 1989.97,-348 2093,-348 2156,-285 P9.1
OUT_R: C29.1 P9.2 | length 531.2
  Top Layer w6: C29.1 v1@1879,-640
  Bottom Layer w6: v1(1880,-641) 1880,-441 1985,-336 2065,-336 2085,-316 P9.2
PB02: U1.47 U2.3 U4.3 U5.3 U6.3 | length 2579.1
  Top Layer w6: v1(1245,-411) 1245,-251 1290,-206 1690,-206 1690,-238.6 U5.3@1695,-243.6 ; v1@1330,-1111.5 1258,-1183.5 1258,-1315.97 1290.03,-1348 1530.03,-1348 1603.11,-1421.08 U1.47
  Top Layer w8: v1(1322.6,-988.6) U2.3
  Top Layer w10: v1@1240.69,-591.69 U6.3 ; U4.3 1682.76,-978.76 v1(1685,-981)
  Bottom Layer w6: v1(1245,-411) 1260,-426 1260,-491 1234.41,-516.59 v1(1234.41,-591.69) 1234.41,-900.41 v1(1322.6,-988.6) ; v1(1327.6,-1115.6) 1327.6,-993.6 v1(1322.6,-988.6) ; v1(1685,-981) 1677.4,-988.6 v1(1322.6,-988.6)
PI_REQUEST_OFF: P1.37 U1.11 | length 2541.9
  Top Layer w6: v1(1470,-1691) 1485.72,-1675.28 U1.11
  Bottom Layer w6: v1(1470,-1691) 1470,-1526 1571,-1425 1885.54,-1425 1902.54,-1408 1916,-1408 1916,-1406 1910,-1400 1910,-1176 1932.47,-1153.53 1932.47,-1074.59 1960.06,-1047 2269,-1047 2315,-1001 2315,-256 2232.53,-173.53 2160.77,-173.53 2122.25,-135 P1.37
PI_SCL: P1.5 R10.1 U3.29 | length 1482.7
  Top Layer w6: P1.5 440,-171.73 440,-322.54 543.46,-426 v1(1020,-426) ; v1(1415,-596) 1453.84,-634.84 U3.29
  Bottom Layer w6: v1(1020,-426) 1110,-336 1200,-336 1357,-493 1357,-498.46 1365,-506.46 1365,-568.43 1382.57,-586 1405,-586 v1(1415,-596)
PI_SDA: P1.3 R9.1 U3.27 | length 1598.7
  Top Layer w6: R9.1@376.73,-237.73 P1.3 ; v1(1395,-556) 1410,-556 1449.47,-595.47 U3.27
  Bottom Layer w6: P1.3 438.2,-73.53 492.69,-73.53 538.2,-28.01 538.2,-19.04 560.77,3.53 700.47,3.53 738.2,-34.2 738.2,-50.96 760.77,-73.53 869.75,-73.53 938.2,-141.99 938.2,-150.96 960.77,-173.53 1132.53,-173.53 1395,-436 v1(1395,-556)
PI_STATUS: P1.26 U1.13 | length 3531.8
  Top Layer w6: v1(1490,-1781) 1530,-1781 1536.57,-1774.43 1583.43,-1774.43 U1.13
  Bottom Layer w6: P1.26 1535.73,24 1615,24 1617,26 2229.97,26 2242,13.97 2242,-118 2339,-215 2339,-1017 2285,-1071 1970,-1071 1956.47,-1084.53 1956.47,-1163.47 1945,-1174.94 1945,-1311 1990,-1356 1990,-1421 1840,-1571 1840,-1741 1800,-1781 v1(1490,-1781)
PI_TURN_OFF: P1.33 U1.12 | length 3053.1
  Top Layer w6: v1@1485,-1721 1511.04,-1694.96 U1.12
  Bottom Layer w6: v1(1485,-1726) 1488,-1723 1488,-1524.97 1568.97,-1444 1917.46,-1444 1928,-1433.46 1928,-1174.97 1944.47,-1158.5 1944.47,-1079.56 1965.03,-1059 2273.97,-1059 2327,-1005.97 2327,-230.78 2230,-133.78 2230,9 2225,14 1945,14 1930,-1 1930,-81.73 P1.33
PPS: P5.2
RESET: P6.2 P8.2 R3.2 U1.40 | length 674
  Top Layer w6: U1.40 1740.91,-1402.56 R3.2 1757.46,-1368.46 1740,-1351 1740,-1286 1735,-1281 v1(1735,-1131) 1735,-1112.93 P6.2
  Bottom Layer w6: P8.2 1646,-1220 v1(1735,-1131)
RESET_PI: P7.2 U1.38 | length 311.6
  Top Layer w6: P7.2 1790,-1181 1810,-1201 1810,-1391 1780.28,-1420.72 U1.38
RXD: P1.8 U1.16 | length 2911.3
  Top Layer w6: v1(1555,-1826) 1600,-1826 1642.48,-1783.52 U1.16
  Bottom Layer w6: P1.8 576.73,-42.73 630,-96 630,-181 650,-201 875,-201 895,-221 895,-331 684.47,-541.53 684.47,-1295.53 1269.95,-1881 1500,-1881 v1(1555,-1826)
RXD2: P5.8 U1.25 | length 1066.6
  Top Layer w6: U1.25 1898.96,-1694.96 v1(1915,-1711)
  Bottom Layer w6: P5.8 1261,-2126 1306.51,-2126 1309.04,-2128.53 1660.5,-2128.53 1915,-1874.03 v1(1915,-1711)
SCK: U1.20
SCL: P2.3 P3.3 P5.6 R2.1 U1.32 | length 4969.1
  Top Layer w6: P2.3 -35,-921 -35,-2046 47.53,-2128.53 1286.47,-2128.53 P5.6 ; P3.3 791,-316 R2.1@936.54,-316 ; U1.32 1891.17,-1557.17 v1(1910,-1576)
  Bottom Layer w6: P2.3 -25,-831 -25,-726 10,-691 223.03,-691 575.03,-339 627,-339 706,-260 P3.3 ; P5.6 1379,-2036 1462.03,-2036 1464.03,-2034 1662,-2034 1860,-1836 1860,-1601 1885,-1576 v1(1910,-1576)
SDA: P2.4 P3.4 P5.4 R1.1 U1.31 | length 4704.5
  Top Layer w6: P2.4 53.53,-809.53 53.53,-1104.26 45,-1112.78 45,-1861 90,-1906 125,-1906 195,-1976 195,-2026 280,-2111 1025,-2111 1095,-2041 1380,-2041 1425,-2086 P5.4 ; P3.4 896,-260 915,-241 R1.1 ; U1.31 1870.85,-1576.85 1885,-1591 v1(1885,-1616)
  Bottom Layer w6: P2.4 160,-771 580,-351 744,-351 P3.4 ; P5.4 1469,-2046 1680,-2046 1762,-1964 1762,-1963.54 1885,-1840.54 v1(1885,-1616)
SWCLK: P8.8 U1.45 | length 539.3
  Top Layer w6: P8.8 1370,-1196 1395,-1171 1565,-1171 1570,-1176 1570,-1346 1642.48,-1418.48 U1.45
SWDIO: P8.10 U1.46 | length 562.1
  Top Layer w6: P8.10 1276,-1220 1270,-1226 1270,-1311 1295,-1336 1535,-1336 1622.8,-1423.8 U1.46
TXD: P1.10 U1.15 | length 2739.1
  Top Layer w6: v1(1485,-1846) 1535,-1796 1605,-1796 1622.8,-1778.2 U1.15
  Bottom Layer w6: P1.10 676.73,-57.94 715.26,-96.47 810.47,-96.47 820,-106 820,-141 868,-189 879.97,-189 907,-216.03 907,-335.97 696.47,-546.5 696.47,-1057.47 1182,-1543 1182,-1776.08 1251.92,-1846 v1(1485,-1846)
TXD2: P5.7 U1.27 | length 1335.9
  Top Layer w6: U1.27 v1@1915,-1655.59
  Bottom Layer w6: P5.7 1186.47,-2028.53 1186.47,-2105.96 1221.04,-2140.53 1665.47,-2140.53 1960,-1846 1960,-1701 v1(1915,-1656)
UP-RX: P16.1 U1.9 | length 1467.7
  Top Layer w6: P16.1 425,-1311 455,-1341 828.03,-1341 860.03,-1373 1097,-1373 1218.22,-1494.22 1218.22,-1663.4 1232.28,-1677.46 1237.06,-1677.46 1247.6,-1688 1323,-1688 1367.41,-1643.59 1507.41,-1643.59 1515.09,-1635.91 U1.9
V_BATT: P4.1 P17.2 P18.2 | length 1053.2
  Top Layer w12: v2@2030,-1866 2038.82,-1874.82 P4.1
  Top Layer w40: P17.2 1895,-1185 1935,-1145 P18.2
  Bottom Layer w15: P18.2 2069,-1145 2100,-1176 2100,-1566 2010,-1656 v2(2010,-1861)
VA: C12.2 C13.1 C17.1 U2.5 U3.5 | length 274.1
  Top Layer w8: C17.1@1584.84,-784.25 U3.5
  Top Layer w12: U2.5 C12.2@1535.9,-867.6 ; C12.2 1540,-851 1590.59,-800.41 C17.1@1590.59,-790
  other v1: 1570,-821
VCC: C5.1 C7.1 C8.1 C9.1 C15.1 C42.1 C43.2 L1.2 L3.2 P2.2 P5.10 P8.9 R1.2 R2.2 R3.1 R4.1 R5.1 R9.2 R10.2 R16.1 U1.17 U1.36 U1.44 Y1.4 | length 1590.8
  Top Layer w6: R9.2 306.54,-292.54 325,-311 R10.2 v1@361.54,-367.54 ; Y1.4 C15.1@765,-491.59 ; v1@1018.46,-344.46 R2.2 R1.2 ; v1(1265,-1646) C5.1 1289.41,-1596.59 1310,-1576 L1.2 ; R5.1 v1(1620,-1971) ; v1(1625,-1841) 1641.59,-1824.41 C8.1 ; C8.1@1662.17,-1821.57 U1.17 ; U1.44 1662.17,-1413.17 1635,-1386 C7.1 1606.59,-1346.59 1595,-1335 1595,-1280 1615,-1260 1660,-1260 1665,-1255 v1(1665,-1240) ; R3.1 v1(1775,-1241) ; R4.1 v1(1780,-1971) ; U1.36 C9.1@1901.98,-1478.43 ; C9.1 v1@1909.41,-1426.59 ; R16.1 C42.1@2127.13,-1719.46
  Top Layer w10: C43.2@2269.76,-1762.3 L3.2
  Top Layer w12: R16.1 2085,-1771 v2(2110,-1796) ; v2(2375,-1866) L3.2
  other v1: 1910,-1426 765,-561 362.6,-368.6 1020,-346
VDDD: C11.1 C30.1 U3.30 U6.5 | length 227.6
  Top Layer w8: U6.5 1353.28,-678.31 1376.18,-655.41 C11.1 C11.1@1395,-645.59 ; C30.1@1350.59,-735 1350.59,-682.72 ; C11.1@1390,-654.53 U3.30
VDDIO: C21.1 C24.2 C25.1 U3.20 U5.5 | length 365.1
  Top Layer w8: C24.2@1453.5,-326 1464.09,-336.59 C25.1 ; C25.1@1524.1,-323.4 1587.76,-323.4 1587.76,-368.76 1619.41,-400.41 C21.1 1619.41,-456.59 1584.84,-491.16 U3.20
VH: C18.2 C19.1 P10.1 P12.1 U4.5 | length 701.1
  Top Layer w6: U4.5 C18.2@1840.9,-847.6 ; C18.2 1843.5,-780.91 C19.1 1845,-779.41 1845,-766 1971,-640 P10.1
  Bottom Layer w6: P12.1 2035,-906 2035,-676 1999,-640 P10.1
VIN: C14.1 C20.1 C26.1 C32.1 C36.2 C39.2 C40.1 C41.2 L2.2 P3.1 P17.3 R11.2 U2.1 U4.1 U5.1 U6.1 U7.6 U9.1 U9.7 | length 6601.2
  Top Layer w6: L2.2@1000.83,-1851 L2.2@1007.36,-1844.46 ; U9.1 2169,-1625 2165,-1621 2165,-1566.54 C41.2 2259,-1540 2290,-1571 2290,-1626 2271.31,-1644.68 U9.7
  Top Layer w10: C39.2 2003.5,-1429.5 2065,-1491 2125,-1491 2135,-1501 C41.2@2135,-1531
  Top Layer w12: U7.6 523.39,-1832.61 535,-1821 535,-1771 550,-1756 980,-1756 1007.36,-1783.36 1007.36,-1844.46 C36.2 1171.54,-1844.46 v2(1235,-1781) R11.2 ; P3.1 585.69,-209.31 1246.69,-209.31 ; L2.2@1000.83,-1976.98 L2.2@1000.83,-1851 ; U2.1 1266.65,-867.6 1265.06,-866 1210,-866 ; U6.1 C32.1@1325.59,-546 ; C32.1 1335.59,-496.59 1210,-496.59 ; C20.1 1606.59,-854.41 1590,-871 1590,-1026 ; C20.1@1626.81,-847.6 U4.1 ; U5.1 C26.1@1746.81,-318.4 ; C26.1@1750,-326 1750,-191 1265,-191 1246.69,-209.31 ; C39.2 C40.1@2003.5,-1340.91 ; C40.1 1925,-1340 P17.3 1828.47,-1243.47 1828.47,-1049.47 1805,-1026 1590,-1026 ; 1210,-866 1210,-1026 1590,-1026 ; 1210,-866 1210,-496.59 ; 1210,-496.59 1210,-246 1246.69,-209.31
  Bottom Layer w20: v2@1232.5,-1778.5 1430,-1581 1430,-1491 1636,-1285 P17.3
pads on no net: P1.32 P4. P4.4 P5.3 P8.1 P8.3 P8.4 P8.6 P15.3 P15.4 P16.3 P16.4 P17.1 P19.3 P19.4 U1.4 U1.14 U1.22 U1.26 U1.28 U1.29 U1.30 U1.39 U1.41 U1.48 U1.49 U3.2 U3.4 U3.6 U3.8 U3.9 U3.15 U3.16 U3.17 U3.18 U3.19 U3.22 U3.28 U6.4 U7.10 U7.12 U7.16 U9.3 U9.4 U9.8 Y1.1
copper on no net: | length 100
  Top Layer w10: 1030,-561 1130,-561

## Polygon pours and split planes (outlines as drawn)
AGND on Internal Plane 1 (split plane): 2486.16,-1019.9 1092.11,-1019.9 1085.1,-1012.89 1085.1,-210.1 2486.16,-210.1
DGND on Internal Plane 1 (split plane): 2486.16,-199.9 1080,-199.9 1078.05,-200.29 1076.4,-201.4 1075.29,-203.05 1074.9,-205 1074.9,-1015 1075.29,-1016.95 1076.4,-1018.6 1086.4,-1028.6 1088.05,-1029.71 1090,-1030.1 2486.16,-1030.1 2486.16,-2131.83 -32.7,-2131.83 -32.7,32.7 2486.16,32.7
VA on Internal Plane 2 (split plane): 2486.16,-1019.9 1092.11,-1019.9 1085.1,-1012.89 1085.1,-210.1 2486.16,-210.1
VCC on Internal Plane 2 (split plane): 2486.16,-199.9 1080,-199.9 1078.05,-200.29 1076.4,-201.4 1075.29,-203.05 1074.9,-205 1074.9,-1015 1075.29,-1016.95 1076.4,-1018.6 1086.4,-1028.6 1088.05,-1029.71 1090,-1030.1 2486.16,-1030.1 2486.16,-2131.83 -32.7,-2131.83 -32.7,32.7 2486.16,32.7

## Other copper
Internal Plane 1 (plane layer: these items are gaps in the copper):
  lines w10: 2491.26,-205 2506.26,-190 2506.26,-1025 1090,-1025 1080,-1015 1080,-205 2505,-205
Internal Plane 2 (plane layer: these items are gaps in the copper):
  lines w10: 1080,-1015 1090,-1025 2501.26,-1025 2506.26,-1020 2506.26,-205 1080,-205 1080,-1015

## Silkscreen, mask and mechanical layers (free items; w line width, h text height)
Top Overlay:
  text "G" at 1970,-376 h60
  text "R" at 2080,-376 h60
  text "L" at 2180,-376 h60
  text "G" at 1920,-456 h60 r90
  text "L" at 1925,-556 h60 r90
  text "V" at 1925,-656 h60 r90
  text "G" at 1925,-761 h60 r90
  text "R" at 1935,-906 h60 r90
  text "+" at 2486.16,-1012.89 h98.43 r90
  text "OFF" at 1760,-1021 h98.43
  text "V" at 2020,-1026 h60 r90
  text "RESET" at 1430,-1091 h60
  text "STOP" at 1460,-1186 h60
  text "-" at 2480,-1400 h98.43 r90
  text "ON" at 1805,-1416 h98.43
  text "Loggerhead v1.0" at 40,-1831 h100 r90
Bottom Overlay:
  text "LEFT" at 2365,-445 h98.43 r90
  text "RIGHT" at 2365,-720 h98.43 r90
  text "+" at 2125,-1165 h98.43 r90
  text "-" at 2115,-1255 h98.43 r90
Mechanical 1:
  the board outline again, w10

## Text inside footprints (layer, text, board x,y; h text height)
C12: Top Overlay "+" at 1520,-835 h19.68 r90
C18: Top Overlay "+" at 1815,-865 h19.68 r180
C24: Top Overlay "+" at 1490,-366 h19.68 r270
C39: Top Overlay "+" at 1970,-1416 h19.68 r180
P1: Top Overlay "1" at 176.73,-155 h60; Top Overlay "60" at 176.73,-55 h50; Top Overlay "40" at 2250,-20 h60; Top Overlay "39" at 2250,-175 h60